# EAGLE board sensors (EAGLE 6.5.0)
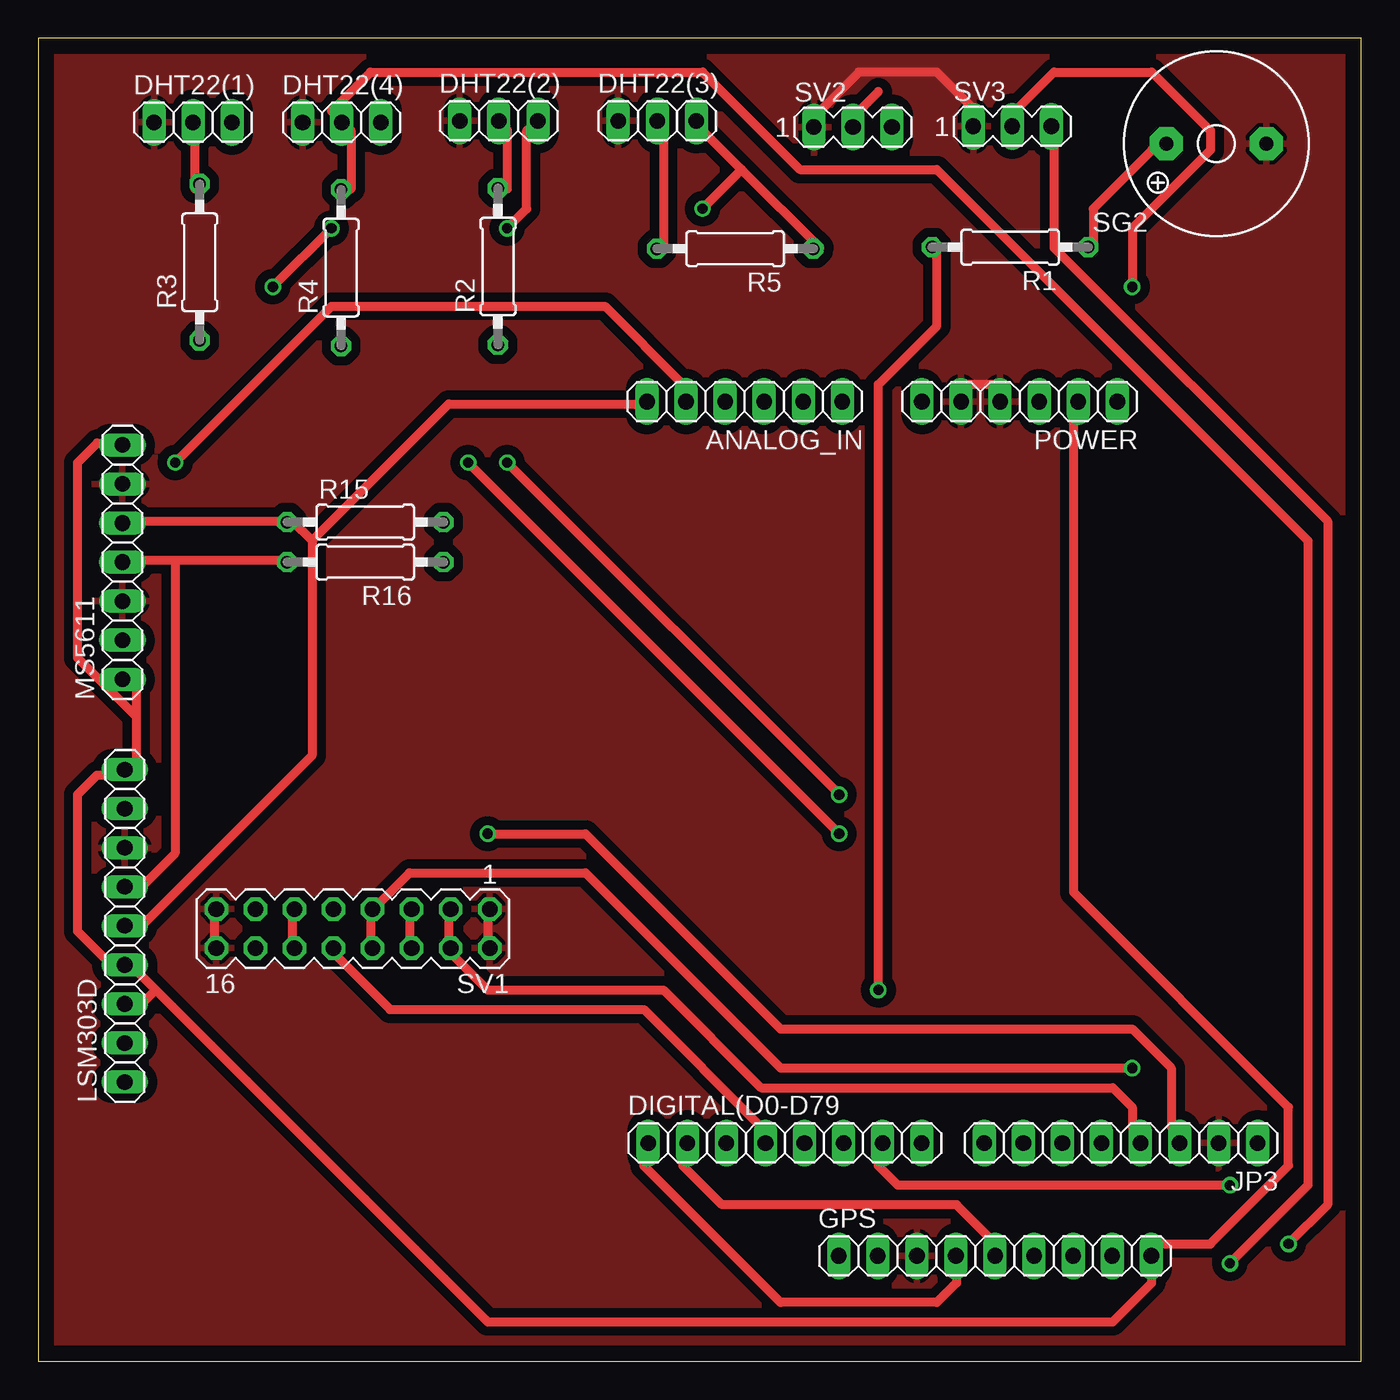
[diagram p0: board, top side]
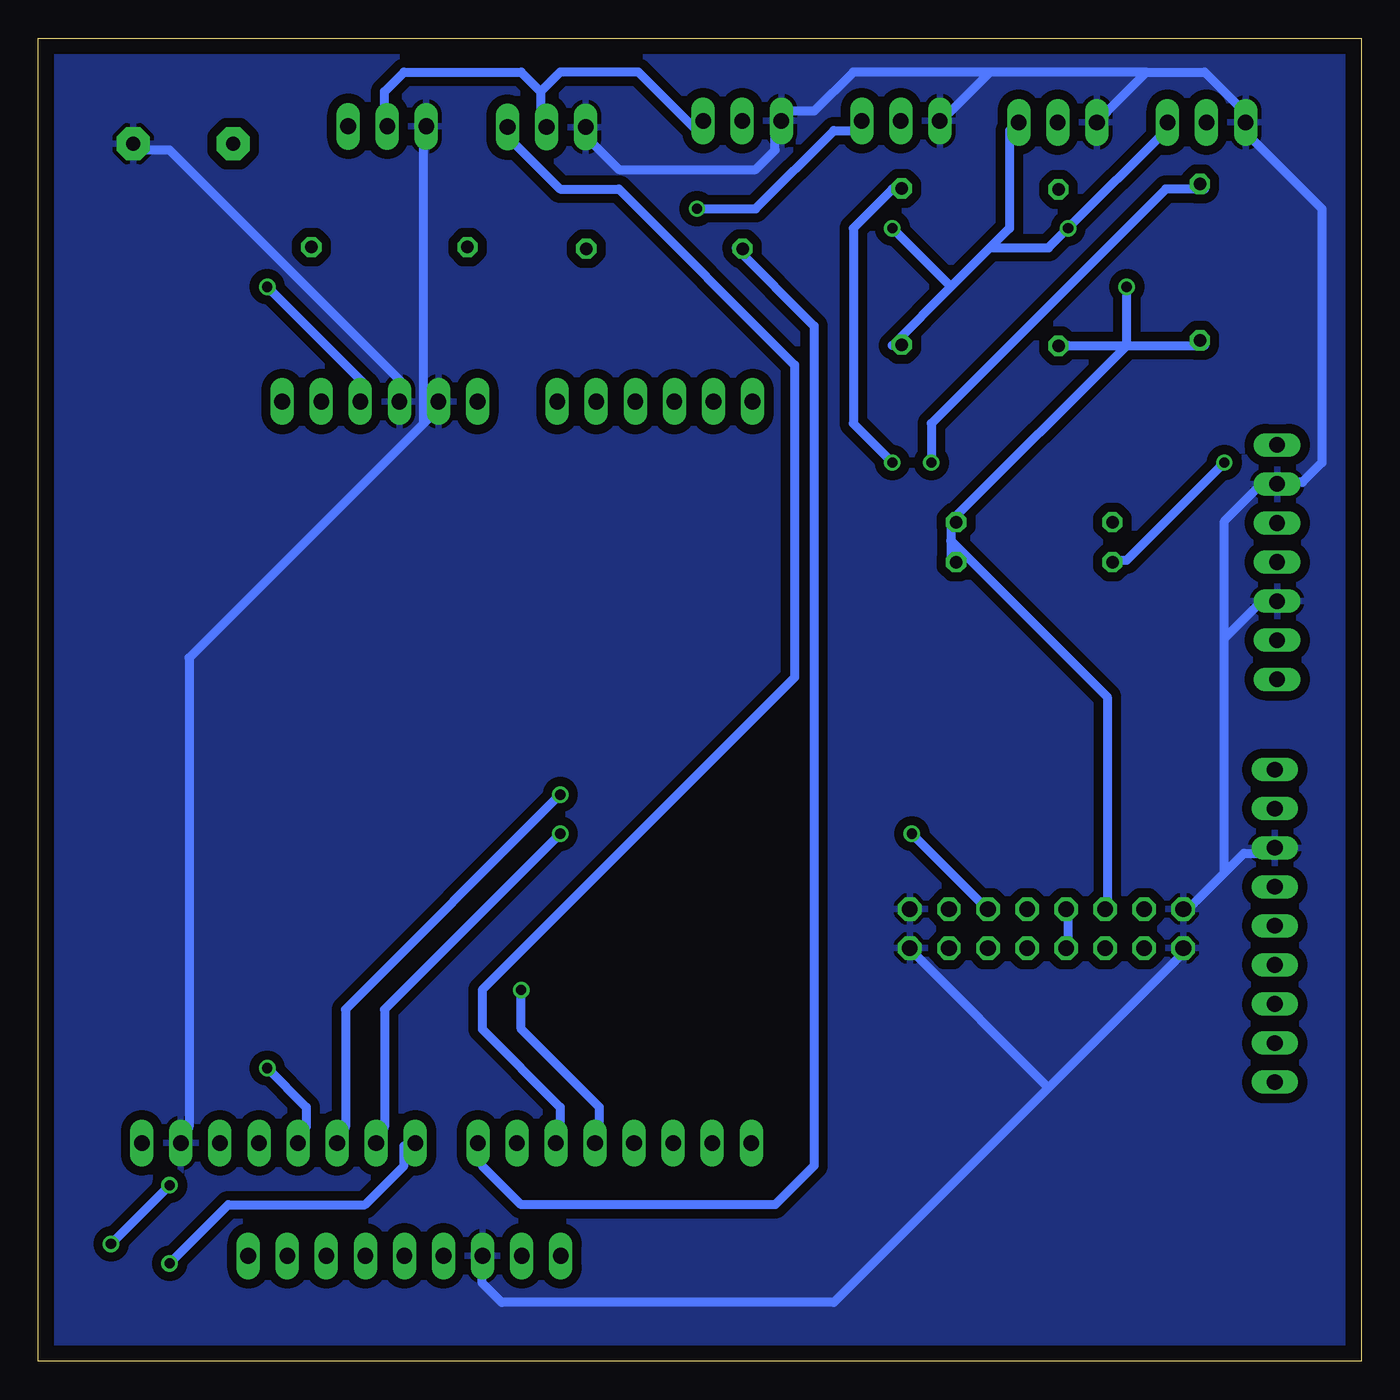
[diagram p1: board, bottom side, seen from below]

Size 86 x 86 mm. Coordinates in mm from the lower left corner, seen from the top.
Outline: 0,0 86,0 86,86 0,86 0,0
Copper layers (1*16): Top 0.035mm / dielectric 1.5mm / Bottom 0.035mm
Design rules "default *": minimum track width 0.6mm, minimum drill 26mil, track to track 0.6mm, track to pad 0.6mm, pad to pad 0.6mm, via to via 0.6mm, smd to smd 0.6mm, copper to edge 40mil, drill to drill 8mil, minimum pad ring 10mil, minimum via ring 8mil, stop-mask expansion 4mil, vias tented up to drill 0mil, thermal gap 10mil
Net classes: 0 default: width 0.406 mm

## Footprints (pad centres in the part's own frame; a part is rotated, then mirrored left to right if it is on the bottom)
1X06 = drill 1.016 long: 1 -6.35,0; 2 -3.81,0; 3 -1.27,0; 4 1.27,0; 5 3.81,0; 6 6.35,0
1X03 = drill 1.016 long: 1 -2.54,0; 2 0,0; 3 2.54,0
1X08 = drill 1.016 long: 1 -8.89,0; 2 -6.35,0; 3 -3.81,0; 4 -1.27,0; 5 1.27,0; 6 3.81,0; 7 6.35,0; 8 8.89,0
1X09 = drill 1.016 long: 1 -10.16,0; 2 -7.62,0; 3 -5.08,0; 4 -2.54,0; 5 0,0; 6 2.54,0; 7 5.08,0; 8 7.62,0; 9 10.16,0
1X07 = drill 1.016 long: 1 -7.62,0; 2 -5.08,0; 3 -2.54,0; 4 0,0; 5 2.54,0; 6 5.08,0; 7 7.62,0
0207/10 = drill 0.813 octagon: 1 -5.08,0; 2 5.08,0
F/QMBIII = drill 0.914 pad 2.159 octagon: + 3.251,0; - -3.251,0
MA08-2 = drill 1.016 octagon: 1 -8.89,-1.27; 2 -8.89,1.27; 3 -6.35,-1.27; 4 -6.35,1.27; 5 -3.81,-1.27; 6 -3.81,1.27; 7 -1.27,-1.27; 8 -1.27,1.27; 9 1.27,-1.27; 10 1.27,1.27; 11 3.81,-1.27; 12 3.81,1.27; 13 6.35,-1.27; 14 6.35,1.27; 15 8.89,-1.27; 16 8.89,1.27
MA03-1 = drill 1.016 long: 1 -2.54,0; 2 0,0; 3 2.54,0

## Placement (x,y rotation side)
ANALOG_IN  [1X06]  45.92,62.39 180 top
DHT22(1)  [1X03]  10.05,80.54 0 top
DHT22(2)  [1X03]  29.93,80.64 0 top
DHT22(3)  [1X03]  40.24,80.64 0 top
DHT22(4)  [1X03]  19.72,80.54 0 top
DIGITAL(D0-D79  [1X08]  48.54,14.18 0 top
GPS  [1X09]  62.2,6.84 0 top
JP3  [1X08]  70.39,14.18 180 top
LSM303D  [1X09]  5.61,28.3 90 top
MS5611  [1X07]  5.46,51.95 90 top
POWER  [1X06]  63.8,62.39 180 top
R1  [0207/10]  63.18,72.43 180 top
R2  [0207/10]  29.88,71.17 90 top
R3  [0207/10]  10.48,71.45 90 top
R4  [0207/10]  19.68,71.1 90 top
R5  [0207/10]  45.3,72.33 180 top
R15  [0207/10]  21.25,54.55 0 top
R16  [0207/10]  21.25,51.95 180 top
SG2  F/QMBIII  [F/QMBIII]  76.59,79.15 180 top
SV1  [MA08-2]  20.45,28.12 180 top
SV2  [MA03-1]  52.96,80.24 0 top
SV3  [MA03-1]  63.32,80.29 0 top

## Library data of the parts
ANALOG_IN DHT22(1) DHT22(2) DHT22(3) DHT22(4) DIGITAL(D0-D79 GPS JP3 LSM303D MS5611 POWER = pinhead
R1-R5 R15 R16 = rcl
SG2 = buzzer; OC_FARNELL: unknown; OC_NEWARK: unknown
SV1-SV3 = con-lstb; OC_FARNELL: unknown; OC_NEWARK: unknown

## Nets
3.3V: GPS.9 LSM303D.3 LSM303D.4 LSM303D.9 MS5611.1 MS5611.7 POWER.2
5: DIGITAL(D0-D79.6 SV2.3
5V: DHT22(1).3 DHT22(2).3 DHT22(3).3 DHT22(4).3 POWER.3 R2.1 R3.1 R4.1 R5.1 R15.2 R16.1 SV1.11 SV1.12 SV2.2 SV3.2
6: DIGITAL(D0-D79.7 SV3.3
7: DHT22(3).2 DIGITAL(D0-D79.8 R5.2
8: DHT22(4).2 JP3.8 R4.2
9: DHT22(1).2 JP3.7 R3.2
10: DHT22(2).2 JP3.6 R2.2
A0: ANALOG_IN.1
A1: ANALOG_IN.2
A2: ANALOG_IN.3
A3: ANALOG_IN.4
AREF: JP3.1
BUZZER: DIGITAL(D0-D79.5 R1.2
CS: DIGITAL(D0-D79.4 SV1.9 SV1.10
GND: DHT22(1).1 DHT22(2).1 DHT22(3).1 DHT22(4).1 GPS.3 JP3.2 LSM303D.7 MS5611.3 MS5611.6 POWER.4 POWER.5 SG2.- SV1.1 SV1.2 SV1.15 SV1.16 SV2.1 SV3.1
MISO: JP3.4 SV1.3 SV1.4
MOSI: JP3.5 SV1.7 SV1.8
N$4: R1.1 SG2.+
N$6: MS5611.2
N$10: GPS.8
N$11: LSM303D.2
N$12: LSM303D.1
N$13: GPS.7
N$14: GPS.6
N$24: GPS.2
N$25: GPS.1
RESET: POWER.1
RX: DIGITAL(D0-D79.1 GPS.4
SCK: JP3.3 SV1.5 SV1.6
SCL: ANALOG_IN.6 LSM303D.5 MS5611.5 R15.1
SDA: ANALOG_IN.5 LSM303D.6 MS5611.4 R16.2
TX: DIGITAL(D0-D79.2 GPS.5
VDD: LSM303D.8
VIN: POWER.6

## Tracks (layer width: path | path; a pad name or v marks a point on that pad's centre or on a via)
3.3V
  Top 0.6: 6.35,41.91 6.35,44.45 MS5611.1 | 6.35,41.91 6.35,38.1 LSM303D.9 5.08,38.1 3.81,38.1 2.54,36.83 2.54,27.94 5.08,25.4 LSM303D.4 6.35,25.4 7.62,24.13 | 6.35,41.91 2.54,45.72 2.54,58.42 3.81,59.69 5.08,59.69 MS5611.7 | 7.62,24.13 29.21,2.54 69.85,2.54 72.39,5.08 72.39,6.35 GPS.9 72.39,7.62 76.2,7.62 81.28,12.7 81.28,16.51 67.31,30.48 67.31,62.23 POWER.2 | 7.62,24.13 6.35,22.86 LSM303D.3
5
  Bottom 0.6: DIGITAL(D0-D79.6 52.07,15.24 52.07,16.51 57.15,21.59 57.15,24.13 36.83,44.45 36.83,64.77 48.26,76.2 52.07,76.2 55.88,80.01 SV2.3
5V  (via drill 0.66)
  Top 0.6: 54.61,82.55 53.34,81.28 SV2.2 | 63.27,80.01 63.5,80.01 SV3.2 63.5,81.28 66.04,83.82 72.39,83.82 76.2,80.01 76.2,78.74 71.12,73.66 v71.12,69.85 | 45.72,77.47 43.18,80.01 DHT22(3).3 | 45.72,77.47 50.8,72.39 R5.1 | 45.72,77.47 v43.18,74.93 | SV1.12 16.51,26.67 16.51,29.21 SV1.11 | v15.24,69.85 v19.05,73.66 | v30.48,73.66 31.75,74.93 31.75,80.01 DHT22(2).3
  Bottom 0.6: v43.18,74.93 39.37,74.93 34.29,80.01 33.02,80.01 DHT22(2).3 | 53.34,82.55 53.34,81.28 SV2.2 | 53.34,82.55 52.07,83.82 46.99,83.82 43.18,80.01 DHT22(3).3 | v71.12,69.85 64.77,63.5 POWER.3 | 53.34,82.55 54.61,83.82 62.23,83.82 63.5,82.55 63.5,81.28 SV3.2 | 24.13,72.39 22.86,73.66 22.86,80.01 DHT22(4).3 | 24.13,72.39 26.67,69.85 | 26.67,69.85 30.48,66.04 R2.1 | 24.13,72.39 20.32,72.39 v19.05,73.66 12.7,80.01 DHT22(1).3 | 26.67,54.61 26.67,53.34 | 26.67,53.34 26.67,52.07 R16.1 | 15.24,66.04 19.05,66.04 R4.1 | 15.24,66.04 10.16,66.04 R3.1 | 15.24,66.04 26.67,54.61 | 26.67,54.61 R15.2 | 26.67,53.34 16.51,43.18 16.51,29.21 SV1.11 | 15.24,66.04 v15.24,69.85 | 26.67,69.85 v30.48,73.66
6  (via drill 0.66)
  Top 0.6: v77.47,11.43 55.88,11.43 54.61,12.7 54.61,13.97 DIGITAL(D0-D79.7 | v81.28,7.62 83.82,10.16 83.82,54.61 66.04,72.39 66.04,80.01 SV3.3
  Bottom 0.6: v81.28,7.62 v77.47,11.43
7
  Top 0.6: R5.2 40.64,72.39 40.64,80.01 DHT22(3).2
  Bottom 0.6: DIGITAL(D0-D79.8 57.15,13.97 57.15,12.7 54.61,10.16 38.1,10.16 35.56,12.7 35.56,67.31 40.64,72.39 R5.2
8  (via drill 0.66)
  Top 0.6: R4.2 20.32,76.2 20.32,80.01 DHT22(4).2 19.05,81.28 21.59,83.82 43.18,83.82 49.53,77.47 58.42,77.47 82.55,53.34 82.55,11.43 v77.47,6.35
  Bottom 0.6: v77.47,6.35 73.66,10.16 64.77,10.16 62.23,12.7 62.23,13.97 JP3.8
9  (via drill 0.66)
  Top 0.6: R3.2 10.16,76.2 10.16,80.01 DHT22(1).2 | v27.94,58.42 v52.07,34.29
  Bottom 0.6: v52.07,34.29 63.5,22.86 63.5,15.24 JP3.7 | v27.94,58.42 27.94,60.96 12.7,76.2 10.16,76.2 R3.2
10  (via drill 0.66)
  Top 0.6: R2.2 30.48,76.2 30.48,80.01 DHT22(2).2 | v30.48,58.42 v52.07,36.83
  Bottom 0.6: v52.07,36.83 66.04,22.86 66.04,15.24 JP3.6 | v30.48,58.42 33.02,60.96 33.02,73.66 30.48,76.2 R2.2
BUZZER  (via drill 0.66)
  Top 0.6: v54.61,24.13 54.61,63.5 58.42,67.31 58.42,72.39 R1.2
  Bottom 0.6: v54.61,24.13 54.61,21.59 49.53,16.51 49.53,15.24 DIGITAL(D0-D79.5
CS
  Top 0.6: DIGITAL(D0-D79.4 46.99,15.24 39.37,22.86 22.86,22.86 19.05,26.67 SV1.10
  Bottom 0.6: SV1.10 19.05,26.67 19.05,29.21 SV1.9
GND
  Top 0.6: SV1.2 29.21,26.67 29.21,29.21 SV1.1 | SV1.16 11.43,26.67 11.43,29.21 SV1.15 | SV2.1 50.8,81.28 53.34,83.82 58.42,83.82 60.96,81.28 SV3.1 | POWER.5 59.69,63.5 62.23,63.5 POWER.4
  Bottom 0.6: 20.32,17.78 11.43,26.67 SV1.16 | 20.32,17.78 34.29,3.81 55.88,3.81 57.15,5.08 57.15,6.35 GPS.3 | 8.89,31.75 11.43,29.21 SV1.15 | 8.89,31.75 7.62,33.02 6.35,33.02 LSM303D.7 | 8.89,46.99 6.35,49.53 MS5611.3 | 8.89,31.75 8.89,46.99 | 8.89,46.99 8.89,54.61 6.35,57.15 MS5611.6 5.08,57.15 3.81,57.15 2.54,58.42 2.54,74.93 7.62,80.01 DHT22(1).1 7.62,81.28 10.16,83.82 13.97,83.82 | 20.32,17.78 29.21,26.67 SV1.2 | 13.97,83.82 16.51,81.28 DHT22(4).1 | 24.13,83.82 26.67,81.28 DHT22(2).1 | 13.97,83.82 24.13,83.82 | 24.13,83.82 33.02,83.82 35.56,81.28 38.1,81.28 DHT22(3).1 38.1,80.01 38.1,78.74 39.37,77.47 48.26,77.47 50.8,80.01 SV2.1 | 60.96,60.96 59.69,62.23 POWER.5 | 60.96,60.96 76.2,45.72 76.2,15.24 JP3.2 | SG2.- 80.01,78.74 77.47,78.74 62.23,63.5 POWER.4 | 60.96,60.96 60.96,80.01 SV3.1
  pour Bottom: 0.15,85.9 85.75,85.9 85.75,0 0,0 0,85.75 0.15,85.75
  pour Top: 0.15,86.05 85.9,86.05 85.9,0 0,0 0,85.9
MISO
  Top 0.6: 26.67,26.67 26.67,29.21 SV1.3 | 26.67,26.67 29.21,24.13 40.64,24.13 46.99,17.78 69.85,17.78 71.12,16.51 71.12,15.24 JP3.4 | 26.67,26.67 SV1.4
MOSI  (via drill 0.66)
  Top 0.6: 21.59,29.21 21.59,26.67 SV1.8 | v71.12,19.05 48.26,19.05 35.56,31.75 24.13,31.75 21.59,29.21 | 21.59,29.21 SV1.7
  Bottom 0.6: v71.12,19.05 68.58,16.51 68.58,15.24 JP3.5
N$4
  Top 0.6: R1.1 68.58,72.39 68.58,74.93 72.39,78.74 SG2.+
RX
  Top 0.6: DIGITAL(D0-D79.1 39.37,13.97 39.37,12.7 48.26,3.81 58.42,3.81 59.69,5.08 59.69,6.35 GPS.4
SCK  (via drill 0.66)
  Top 0.6: SV1.6 24.13,26.67 24.13,29.21 SV1.5 | v29.21,34.29 35.56,34.29 48.26,21.59 71.12,21.59 73.66,19.05 73.66,15.24 JP3.3
  Bottom 0.6: v29.21,34.29 24.13,29.21 SV1.5
SCL
  Top 0.6: 16.51,54.61 6.35,54.61 MS5611.5 | 17.78,53.34 17.78,39.37 6.35,27.94 LSM303D.5 | 16.51,54.61 17.78,53.34 | 16.51,54.61 R15.1 | 17.78,53.34 26.67,62.23 39.37,62.23 ANALOG_IN.6
SDA  (via drill 0.66)
  Top 0.6: 8.89,52.07 6.35,52.07 MS5611.4 | 8.89,52.07 16.51,52.07 R16.2 | 8.89,52.07 8.89,33.02 6.35,30.48 LSM303D.6 | v8.89,58.42 19.05,68.58 36.83,68.58 41.91,63.5 ANALOG_IN.5
  Bottom 0.6: v8.89,58.42 15.24,52.07 16.51,52.07 R16.2
TX
  Top 0.6: DIGITAL(D0-D79.2 41.91,13.97 41.91,12.7 44.45,10.16 59.69,10.16 62.23,7.62 GPS.5